# Altium PCB Gluon.PcbDoc
Units mil, origin at the board's own origin, x right, y up, seen from the top; angles counter-clockwise.
Board outline 293 x 669.29 mil, 2 copper layers (Top1, Bottom2), stack 42.204 mil thick; 22 components, 19 nets, 83 pads, 68 vias.
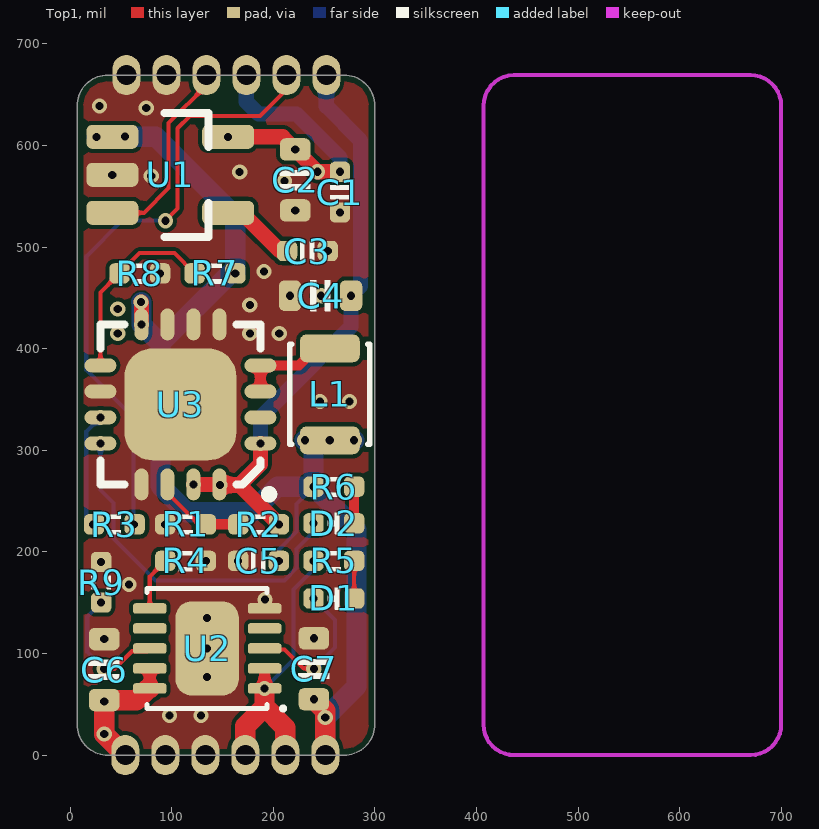
[diagram p0: Top1 view]
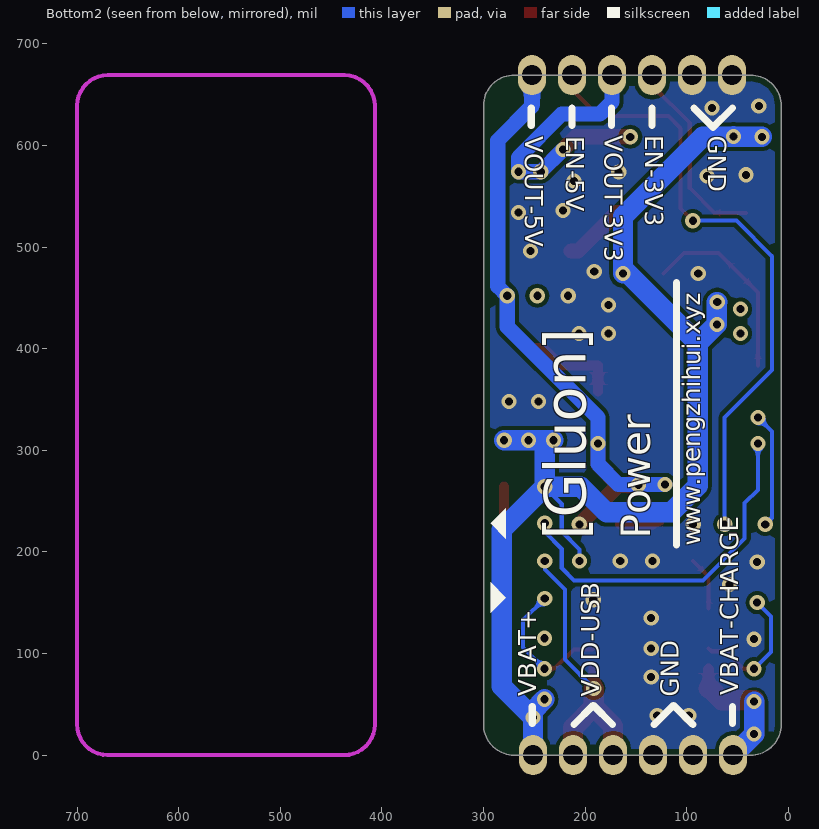
[diagram p1: Bottom2 view, seen from below]
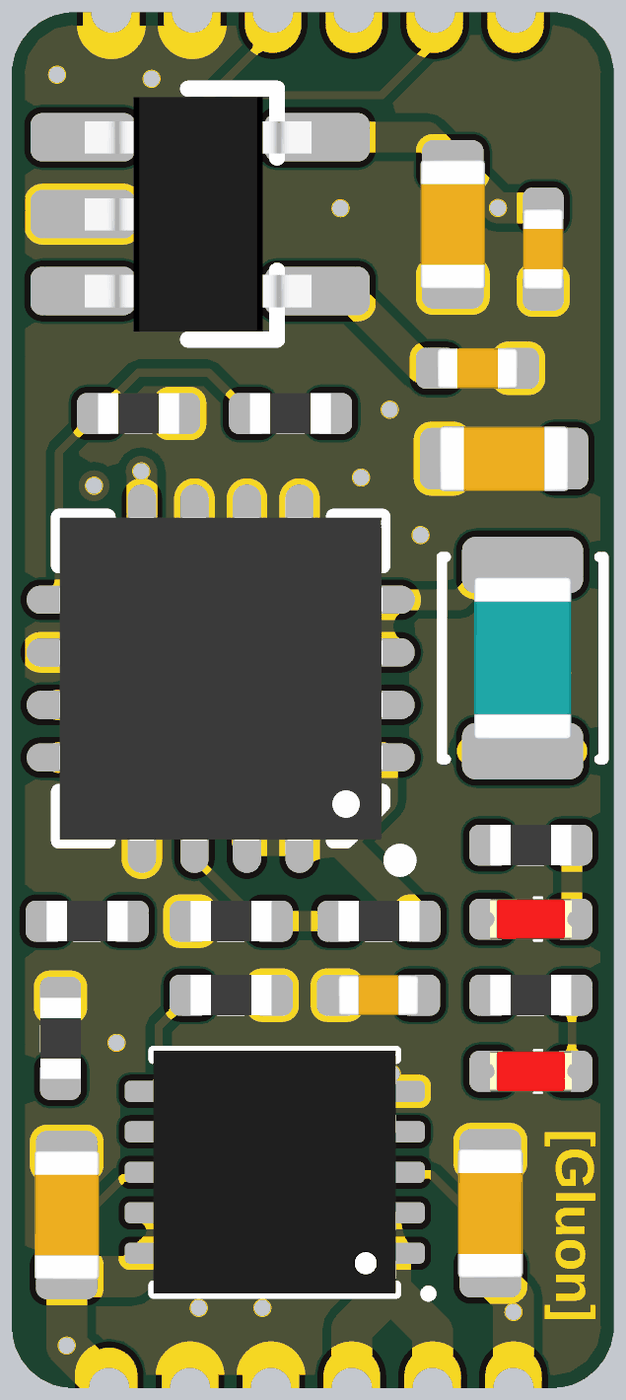
[diagram p2: 3D render of the assembled board from above, using the file's embedded part models]

## Layer stack, top to bottom
Top Solder: solder mask 0.394, Solder Resist, Dk 3.5
Top1: signal copper 1.417
Dielectric1: prepreg 39.3701, PP-006, Dk 4.1
Bottom2: signal copper 1.417
Bottom Solder: solder mask 0.394, Solder Resist, Dk 3.5

## Board outline
7,30 7,639 cw(c37.15,639.15) 37,669.29 269.71,669.29 cw(c269.85,639.15) 300,639.29 300,30.29 cw(c269.85,30.15) 270,0 37.29,0 cw(c37.15,30.15)

## Design rules (kind name [scope] priority, off if disabled: settings)
Clearance [All] p1: gap=4 ignorepadtopadclearanceinfootprint=FALSE except(0: Arc-Hole Track-Hole SMDPad-Hole THPad-Hole Via-Hole Fill-Hole Poly-Hole Region-Hole Text-Hole)
ComponentClearance [All] p1: gap=0 collisioncheckmode=3 verticalgap=0 showdistances=FALSE
DiffPairsRouting [All] p1: maxlimit=9 minlimit=9 mostfreqgap=9 toplayer_minwidth=15 toplayer_maxwidth=15 toplayer_prefwidth=15 bottomlayer_minwidth=15 bottomlayer_maxwidth=15 bottomlayer_prefwidth=15 maxuncoupledlength=500
FanoutControl Fanout_BGA [All] p1: bgadir=Out bgaviamode=Centered fanoutstyle=Auto fanoutdirection=Alternating viagrid=1 // Fanout_BGA (Default Rule)
HoleSize [All] p1: absolutevalues=TRUE maxlimit=10000 minlimit=8 maxpercent=80.000 minpercent=20.000
MinimumSolderMaskSliver [All] p1 off: minsoldermaskwidth=2
PlaneClearance [All] p1: clearance=8
PlaneConnect [All] p1: planeconnectstyle=Direct reliefexpansion=20 reliefentries=4 reliefconductorwidth=10 reliefairgap=10
PolygonConnect [All] p1: connectstyle=Direct reliefconductorwidth=10 reliefentries=4 polygonreliefangle="90 Angle" airgapwidth=10
RoutingVias [All] p1: holewidth=8 width=16 viastyle="Through Hole" minholewidth=6 minwidth=12 maxholewidth=28 maxwidth=50
SilkToSilkClearance [All] p1: silktosilkclearance=0
SilkToSolderMaskClearance [IsPad] p1: minsilkscreentomaskgap=0 clearancetoexposedcopper=TRUE
SolderMaskExpansion [All] p1: expansion=3
Width GND [(InNet('AGND') OR InNet('GND'))] p1: maxlimit=50 minlimit=4 preferedwidth=10
Width VCC [(InNet('VDD_SYS_3.3V') OR InNet('VDD_AV_3.3V') OR InNet('VDD_5V') OR InNet('VDD1V2-SYS') OR InNet('VDD1V1-EPHY') OR InNet('VDD-CPUX') OR InNet('VDD-CPUS') OR InNet('VDD-CPUFB') OR InNet('VCC-DRAM'))] p2: maxlimit=50 minlimit=4 preferedwidth=10
Width [All] p3: maxlimit=10000 minlimit=4 preferedwidth=4
21 further rules are at their usual default settings.

## Components (designator, comment, footprint, x,y, rotation, side; value= is the part's Value field where it differs from the comment)
C1 "0.1uF" CAP_0402 265.69,554.16 r90 top value=0.1u
C2 "10uF" 0603-CAP 221.69,566.16 r90 top value=0.1u
C3 "10nF" CAP_0402 233.69,496.16 r180 top value=0.1u
C4 "10uF" 0603-CAP 246.69,452.16 r180 top value=0.1u
C5 "0.1uF" CAP_0402 185.48,191.16 r180 top value=0.1u
C6 "10uF" 0603-CAP 33.69,84.16 r90 top value=0.1u
C7 "10uF" 0603-CAP 240,85 r270 top value=0.1u
D1 "color?" LED_0402_RED 259.69,154.16 r180 top
D2 "=Value" LED_0402_RED 259.69,228.16 r180 top
L1 "6.8uH" 2520-L 255.69,355.16 r90 top
R1 "240K" RES_0402 113.69,227.16 r0 top value=22R
R2 "2M" RES_0402 185.69,227.16 r0 top value=22R
R3 "200K" RES_0402 43.69,227.16 r180 top value=22R
R4 "2K" RES_0402 113.75,191.16 r180 top value=22R
R5 "1K" RES_0402 259.69,191.16 r0 top value=22R
R6 "2K" RES_0402 259.69,264.16 r180 top value=22R
R7 "1.87M" RES_0402 142.69,474.16 r180 top value=22R
R8 "340K" RES_0402 68.69,474.16 r180 top value=22R
R9 "10K" RES_0402 30.69,170.16 r270 top value=22R
U1 "LP2992 3V3" SOT23-5 100.69,571.16 r0 top
U2 "MCP73833T-AMI/MF" QFN-10 135,105 r180 top
U3 "TPS61090" QFN-16 108.69,345.16 r180 top

## Footprints (in the part's own frame and the unit in brackets; to place one, negate y for a bottom-side part, rotate by r counter-clockwise, add the part's x,y. Pads: shape width x height; smd on the part's side, far side on the other; paste and mask are expansions set on the pad)
0603-CAP [mil]
  rrect50% 22x30 smd: 1(-30,0) 2(30,0)
  silkscreen extent -10,-15 10,15, body extent -31,-16 32,16, height 31
2520-L [mm]
  rrect50% 0.7x1.5 smd: 1(-1.15,0) 2(1.15,0)
  silkscreen extent -1.25,-1 1.25,1, body extent -1,-0.6 1,0.6, height 0.92
CAP_0402 [mil]
  rrect50% 20x20 smd: 1(-20,0) 2(20,0)
  silkscreen extent -7,-9 7,9, body extent -20,-10 20,10, height 20
LED_0402_RED [mil]
  rrect50% 20x20 smd: 1(-20,0) 2(20,0)
  silkscreen extent -6,-10 6,10, body extent -20,-10 20,10, height 18
QFN-10 [mm]
  rrect50% 0.84x0.26 smd: 1(-1.435,1) 2(-1.435,0.5) 3(-1.435,0) 4(-1.435,-0.5) 5(-1.435,-1) 6(1.435,-1) 7(1.435,-0.5) 8(1.435,0) 9(1.435,0.5) 10(1.435,1)
  rrect50% 1.58x2.35 smd: 11(0,0)
  silkscreen extent -1.95,-1.5 1.5,1.55, body extent -1.5,-1.5 1.5,1.5, height 0.6
QFN-16 [mm]
  oval 0.8x0.35 smd: 1(-2,0.975) 2(-2,0.325) 3(-2,-0.325) 4(-2,-0.975) 9(2,-0.975) 10(2,-0.325) 11(2,0.325) 12(2,0.975)
  oval 0.35x0.8 smd: 5(-0.975,-2) 6(-0.325,-2) 7(0.325,-2) 8(0.975,-2) 13(0.975,2) 14(0.325,2) 15(-0.325,2) 16(-0.975,2)
  rrect50% 2.8x2.8 smd: 17(0,0)
  silkscreen extent -2.36,-2 2,2.39, body extent -2,-2 2,2, height 0.92
RES_0402 [mil]
  rrect50% 20x20 smd: 1(-20,0) 2(20,0)
  silkscreen extent -6,-10 6,10, body extent -20,-10 20,10, height 14
SOT23-5 [mm] "SOT23, 3-Leads, Body 3.1x3.0mm (max), Pitch 0.95mm, IPC Medium Density"
  rrect50% 1.3x0.6 smd: 1(-1.5,0.95) 2(-1.5,0) 3(-1.5,-0.95) 4(1.396,-0.95) 5(1.396,0.95)
  silkscreen extent -0.2,-1.55 0.9,1.55, body extent -1.48,-1.45 1.32,1.45, height 1.2

## Part data
C1 C3 C5: library part 电容-0402, "Capacitor"
C2 C4 C6 C7: library part 电容-0603, "Capacitor"
D1 D2: library part LED_0402, "LED", Type=0402
L1: library part 电感-2520, "磁珠"
R1 R2 R3 R4 R5 R6 R7 R8 R9: library part 电阻-0402, "Resistor"
U1: library part LP2992, "LDO"
U2: library part MCP73833T, "Linear Charge Management Controller Li-Ion/Li-Pol 1mA 4.2V/4.35V/4.4V/4.5V 10-Pin DFN EP T/R", Package="DFN-10 Microchip", Availability=Unavailable, MF=Microchip, MP=MCP73833T-AMI/MF, Price=None, SnapEDA_Link=https://www.snapeda.com/parts/MCP73833T-AMI/MF/Microchip/view-part/?ref=snap
U3: "the tps6109x devices provide a power supply solution for products powered by either a one-cell li-ion or li-polymer o...", Package="QFN-16 Texas Instruments", Availability=Unavailable, MF="Texas Instruments", MP=TPS61090, Price=None, SnapEDA_Link=https://www.snapeda.com/parts/TPS61090/Texas%20Instruments/view-part/?ref=snap

## Free pads (board coordinates)
  oval 27.56x39.37 hole 19.68: 1(55.42,669.29) 2(94.79,669.29) 3(134.16,669.29) 4(173.53,669.29) 5(212.91,669.29) 6(252.28,669.29) 7(251.23,0) 8(211.86,0) 9(172.49,0) 10(133.12,0) 11(93.75,0) 12(54.38,0)

## Via types
v1: diameter 15, hole 8, Top1 to Bottom2, tented both sides, 68 vias

## Nets (pads, with @x,y where several pads share a name; then routed paths per layer and width w, separated by ;. In a path a pad name is that pad's centre, name@x,y a point inside that pad or via, vN(x,y) a via of type N, cw(c..) or ccw(c..) an arc to the next point about the centre after c; other vN are vias at no path point)
EN_3V3: pad.3 U1.3 | length 192.1
  Top1 w4: U1.3 72.76,533.76 97,558 97,622 134.16,659.16 pad.3
EN_5V: pad.5 R3.1 | length 608.6
  Top1 w4: v1(94,526) 106,538 106,617 118,629 187,629 212.91,654.91 pad.5
  Bottom2 w4: v1(62.69,227.16) 62.69,332.32 16,379 16,491 51,526 v1(94,526)
GND: C1.1 C2.1 C3.1 C4.2 C5.2 C6.2 C7.1 pad.1 pad.2 pad.10 pad.11 R1.1 R4.1 R8.1 R9.1 U1.2 U2.5 U2.11 U3.5 U3.6 U3.7 U3.10 U3.13 U3.17
  other v1: 98,39 129,39 135,77 135,105 33.69,114.16 240,115 135,135 192,153 58,168 30.69,190.16 133.75,191.16 165.48,191.16 93.69,227.16 246,348 275,348 177,415 206,415 177,443 216.69,452.16 88.69,474.16 191,476 253.69,496.16 265.69,534.16 221.69,536.16 211,565 80,570 41.63,571.16 167,574 75,637 29,639
NetC3_2: C3.2 U1.4 | length 73.8
  Top1 w15: U1.4 169.41,533.76 173.72,529.44 173.72,529.24 206.8,496.16 C3.2
NetD1_1: D1.1 R5.2 | length 37
  Top1 w4: D1.1 R5.2
NetD1_2: D1.2 U2.3 | length 143.5
  Top1 w4: U2.3 192.56,103.93 211.07,103.93 229.45,85.55 239.45,85.55 v1(240,85)
  Bottom2 w4: v1(239.69,154.16) 261,132.84 261,106 v1(240,85)
NetD2_1: D2.1 R6.1 | length 36
  Top1 w10: D2.1 R6.1
NetD2_2: D2.2 U3.12 | length 352.2
  Bottom2 w4: v1(29.94,306.77) 29.94,261.06 43,248 43,213 84,172 211,172 223,184 223,203 239.69,219.69 v1(239.69,228.16)
NetL1_2: L1.2 U3.3 U3.4 | length 101.6
  Top1 w10: U3.3 U3.4 225.3,383.54 231.16,389.4 231.16,390.63 240.96,400.43 L1.2
NetR1_2: R1.2 R2.1 U3.14 | length 90.9
  Top1 w4: U3.14 95.89,258.11 126.84,227.16 R1.2
  Top1 w10: R1.2 R2.1
NetR3_2: R3.2 U3.11 | length 115.4
  Bottom2 w4: v1@22.69,228.76 v1(22.69,227.16) 16,233.84 16,318.42 v1(29.94,332.36)
NetR4_2: R4.2 U2.6 | length 53.1
  Top1 w4: U2.6 78.5,175.91 R4.2
NetR7_2: R7.2 R8.2 U3.9 | length 188.8
  Top1 w4: U3.9 29.94,455.42 R8.2 68.53,494 102.84,494 R7.2
NetR9_2: R9.2 U2.8 | length 133.8
  Top1 w4: v1(33.69,85) 44,85 61.23,102.23 75.73,102.23 U2.8
  Bottom2 w4: v1(30.69,150.16) 17,136.47 17,101.69 v1(33.69,85) v1@33.69,87.98
VBAT: C5.1 C7.2 L1.1 pad.7 R6.2 R7.1 U1.1 U3.8 | length 1272.6
  Top1 w15: v1(70,446) 70.3,445.7 v1(70.3,423.9)
  Top1 w20: v1(240,55) 251.23,43.77 v1(251.23,37) pad.7
  Bottom2 w4: v1(205.48,191.16) 205.48,202.48 223,220 223,247 239.69,263.69 v1(239.69,264.16)
  Bottom2 w20: v1(26,608.56) 53.56,608.56 v1(54,609) 54.44,608.56 84.44,608.56 162.69,530.32 v1(162.69,474.16) 157.96,474.16 89,405.2 ; v1(70,446) 70.3,445.7 v1(70.3,423.9) 89,405.2 ; v1(240,55) 251.23,43.77 v1(251.23,37) ; pad.7 v1(251.23,37) ; v1(279.69,309.88) v1(255.69,309.88) 239.69,309.88 v1(231.16,309.88) 239.69,301.35 v1(239.69,264.16) ; 89,405.2 89,265 115,239 179,239 204.16,264.16 v1(239.69,264.16) ; v1(239.69,264.16) 239.84,264.16 282,222 282,67.77 v1(251.23,37)
VBAT_IN: C6.1 pad.12 U2.9 U2.10 | length 193.2
  Top1 w10: U2.10 U2.9
  Top1 w20: pad.12 v1(33.69,20.69) C6.1 65.38,54.16 76.85,65.63 U2.10
  Bottom2 w20: v1(33.69,52.66) v1(33.69,20.69) pad.12
VDD_3V3: C1.2 C2.2 pad.4 U1.5 | length 332.7
  Top1 w15: v1(155.63,608.56) 209.28,608.56 v1(221.69,596.16) v1(243.69,574.16) v1(265.69,574.16)
  Bottom2 w15: pad.4 173.53,643 185.53,631 223,631 265.69,588.32 v1(265.69,574.16) v1(243.69,574.16) v1(221.69,596.16)
VDD_5V: C4.1 pad.6 R2.2 U3.1 U3.15 U3.16 | length 661.7
  Top1 w15: v1(121.48,266.42) U3.16 v1(147.6,265.88) 166.96,265.88 ; v1(187.43,306.77) 187.43,286.35 166.96,265.88 ; v1(205.69,227.16) 166.96,265.88
  Bottom2 w15: v1(121.48,266.42) 167.42,266.42 187.43,286.43 v1(187.43,306.77) 187.43,332.43 206,351 276.69,421.68 v1(276.69,452.16) 286,461.47 286,605 252.28,638.72 pad.6
VDD_USB_5V: pad.8 pad.9 R5.1 U2.1 U2.2 | length 294.6
  Top1 w10: v1(191.5,65.63) U2.2
  Top1 w20: pad.9 172.49,28.49 191.5,47.5 ; v1(191.5,65.63) 191.5,47.5 ; pad.8 211.86,27.13 191.5,47.5
  Bottom2 w4: v1(191.5,65.63) 220,94.13 220,163 239.69,182.69 v1(239.69,191.16)
pads on no net: U2.4 U2.7 U3.2
copper on no net:
  other v1: 47,415 47,439 247,452.16

## Polygon pours and split planes (outlines as drawn)
GND on Top1 "Top1-No Net" (solid, remove dead copper, pour order 0): 7,0 300,0 300,669.29 7,669.29
GND on Bottom2 "Top1-No Net" (solid, remove dead copper, pour order 1): 7,0 300,0 300,669.29 7,669.29

## Keep-outs
Keep-Out Layer:
  lines w4: 407,30 ccw(c437.15,30.15) 437.29,0 670,0 ccw(c669.85,30.15) 700,30.29 700,639.29 ccw(c669.85,639.15) 669.71,669.29 437,669.29 ccw(c437.15,639.15) 407,639 407,30

## Other copper
Top1:
  pour cut-out: 39.37,669.29

## Silkscreen, mask and mechanical layers (free items; w line width, h text height)
Bottom Overlay:
  region: 293,170 293,140 278,155
  region: 278,213 278,243 293,228
  lines w7: 55,31 55,48 ; 55,637 74,618 93,637 ; 94,30 113,49 132,30 ; 110,207 110,465 ; 134,620 134,637 ; 173,30 192,49 211,30 ; 174,620 174,637 ; 213,620 213,637 ; 252,31 252,48 ; 253,620 253,637
  text "EN-3V3" at 146.59,609.91 h30 r90
  text "VOUT-3V3" at 186.59,609.91 h30 r90
  text "GND" at 84.94,609.45 h30 r90
  text "EN-5V" at 224.59,609.27 h30 r90
  text "VOUT-5V" at 264.59,609.27 h30 r90
  text "Power" at 126,213 h50 r270
  text "[Gluon]" at 185.84,212.14 h70 r270
  text "www.pengzhihui.xyz" at 81,206 h30 r270
  text "VBAT-CHARGE" at 43.41,58.73 h30 r270
  text "VDD-USB" at 180.06,57.67 h30 r270
  text "VBAT+" at 242,58 h30 r270
  text "GND" at 102.06,57.55 h30 r270
Top Solder:
  text "[Gluon]" at 272,126 h30 r270
Mechanical 1:
  the board outline again, w4